# Altium PCB switch_mode.PcbDoc
Units mil, origin at the board's own origin, x right, y up, seen from the top; angles counter-clockwise.
Board outline 1830 x 1455 mil, 4 copper layers (Top Layer, Plane (GND), Plane (PWR), Bottom Layer), stack 23.756 mil thick; 16 components, 11 nets, 41 pads, 10 vias.
Unrouted connection lines stored in the file: 13.
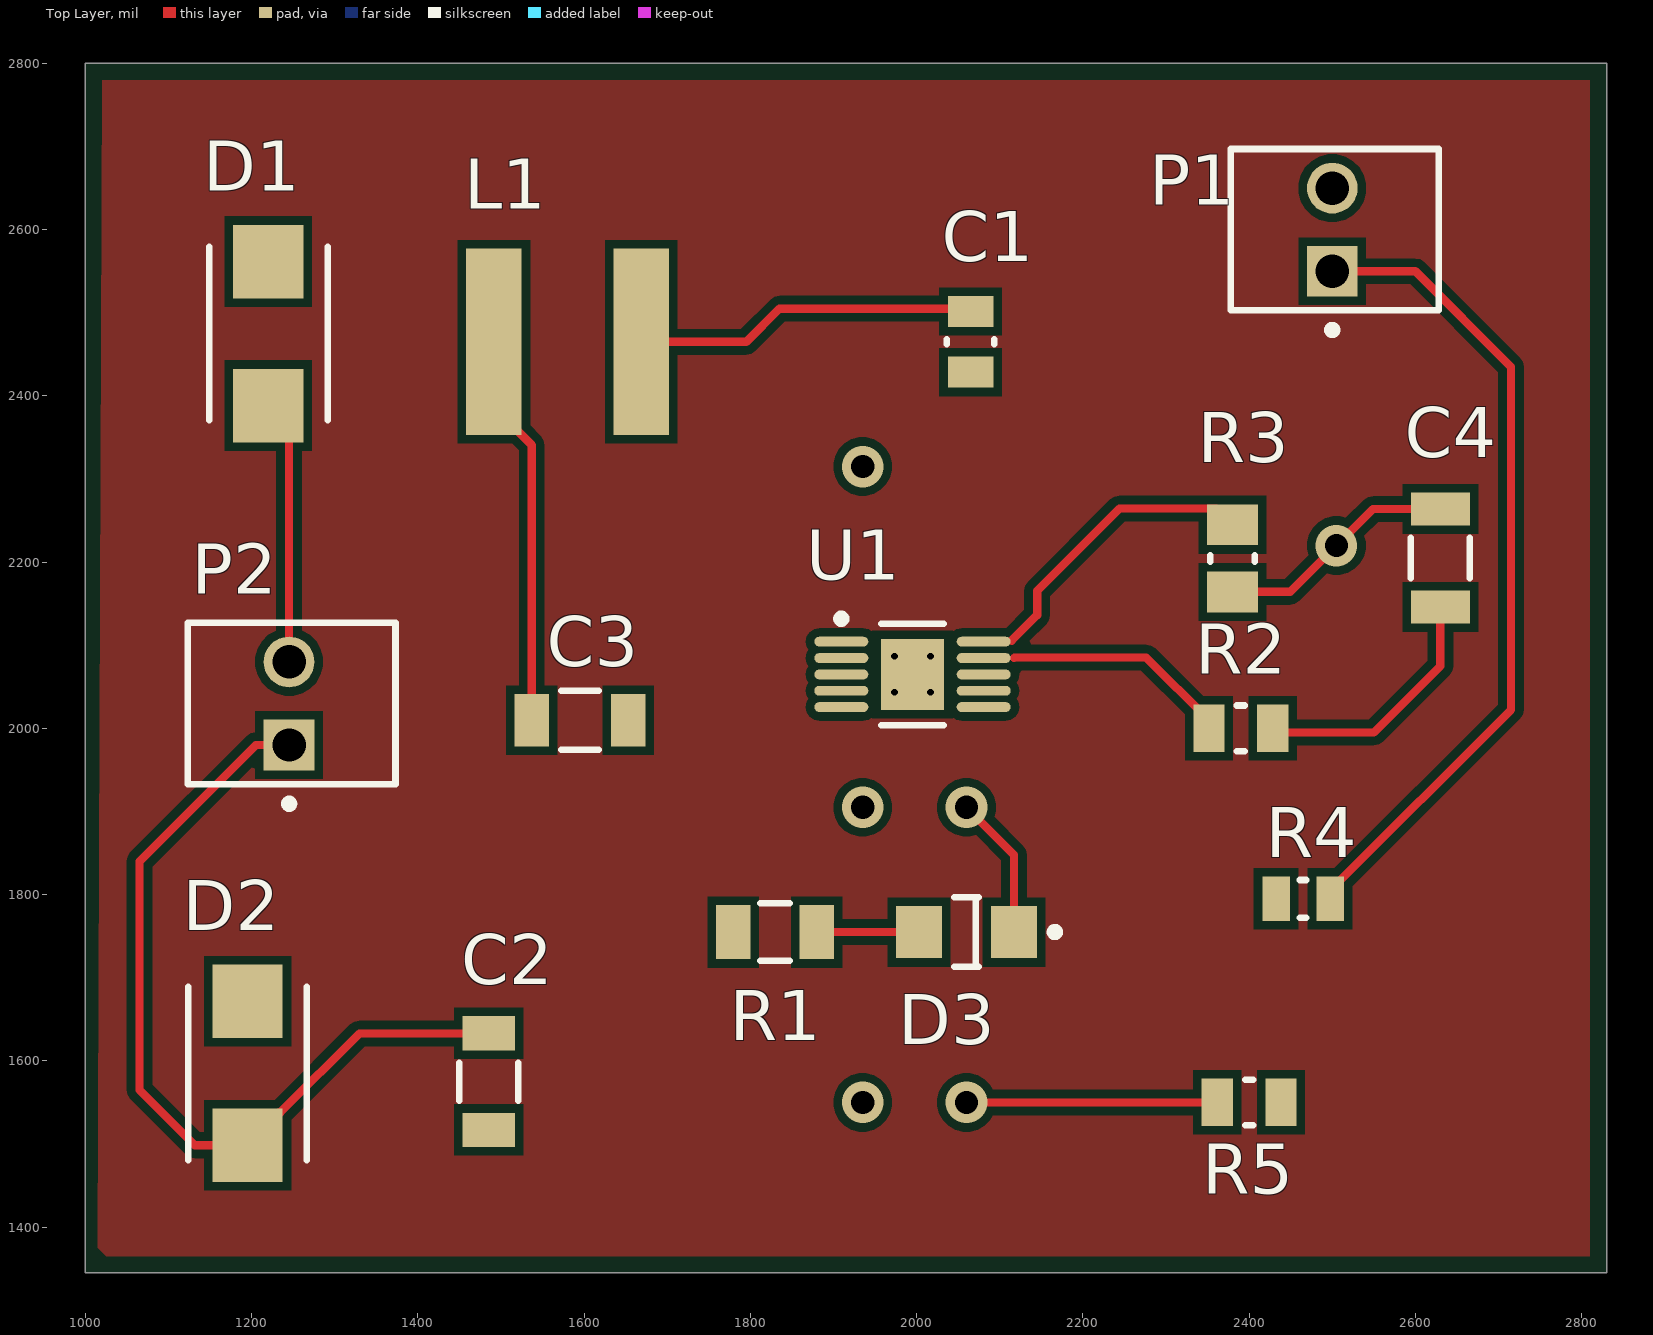
[diagram p0: Top Layer view]
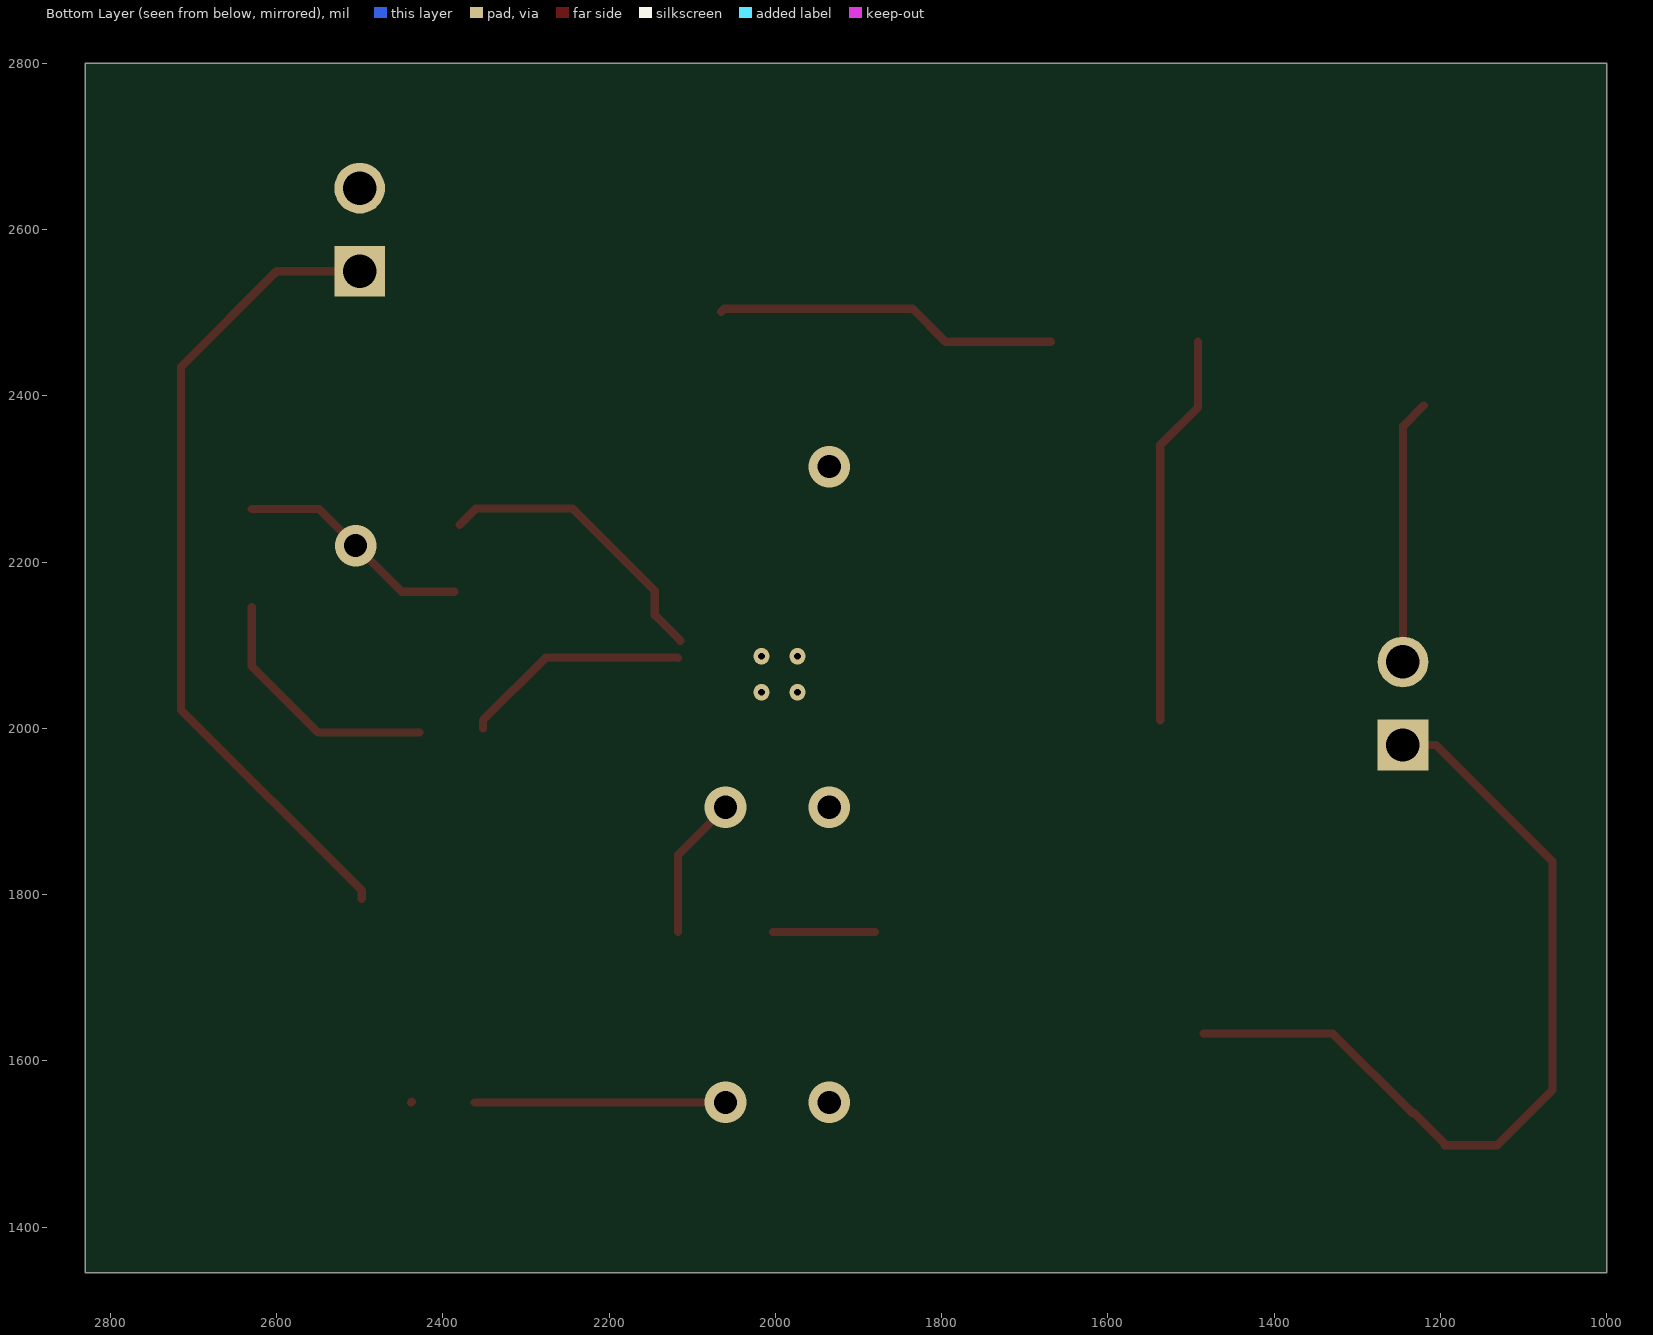
[diagram p1: Bottom Layer view, seen from below]
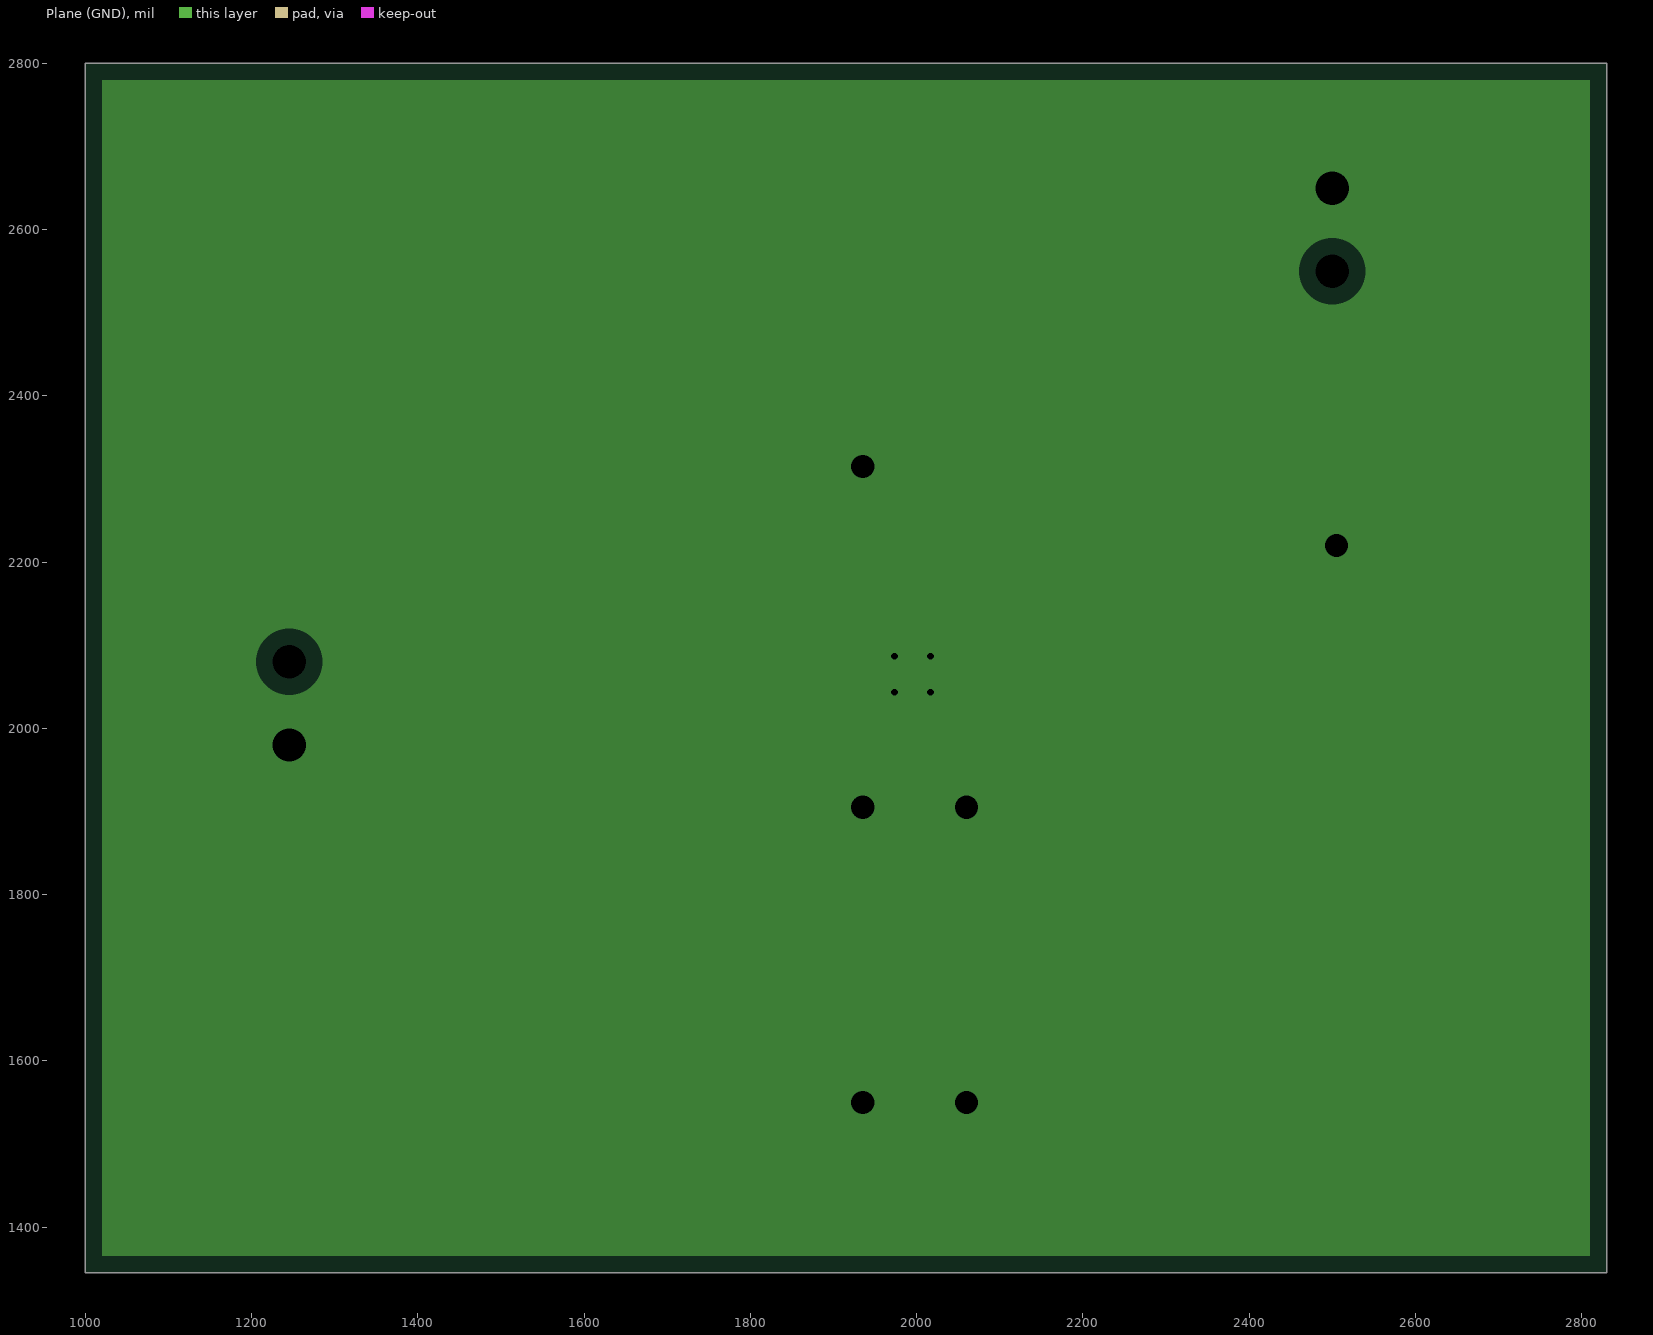
[diagram p2: Plane (GND), clearances drawn from the general rule]
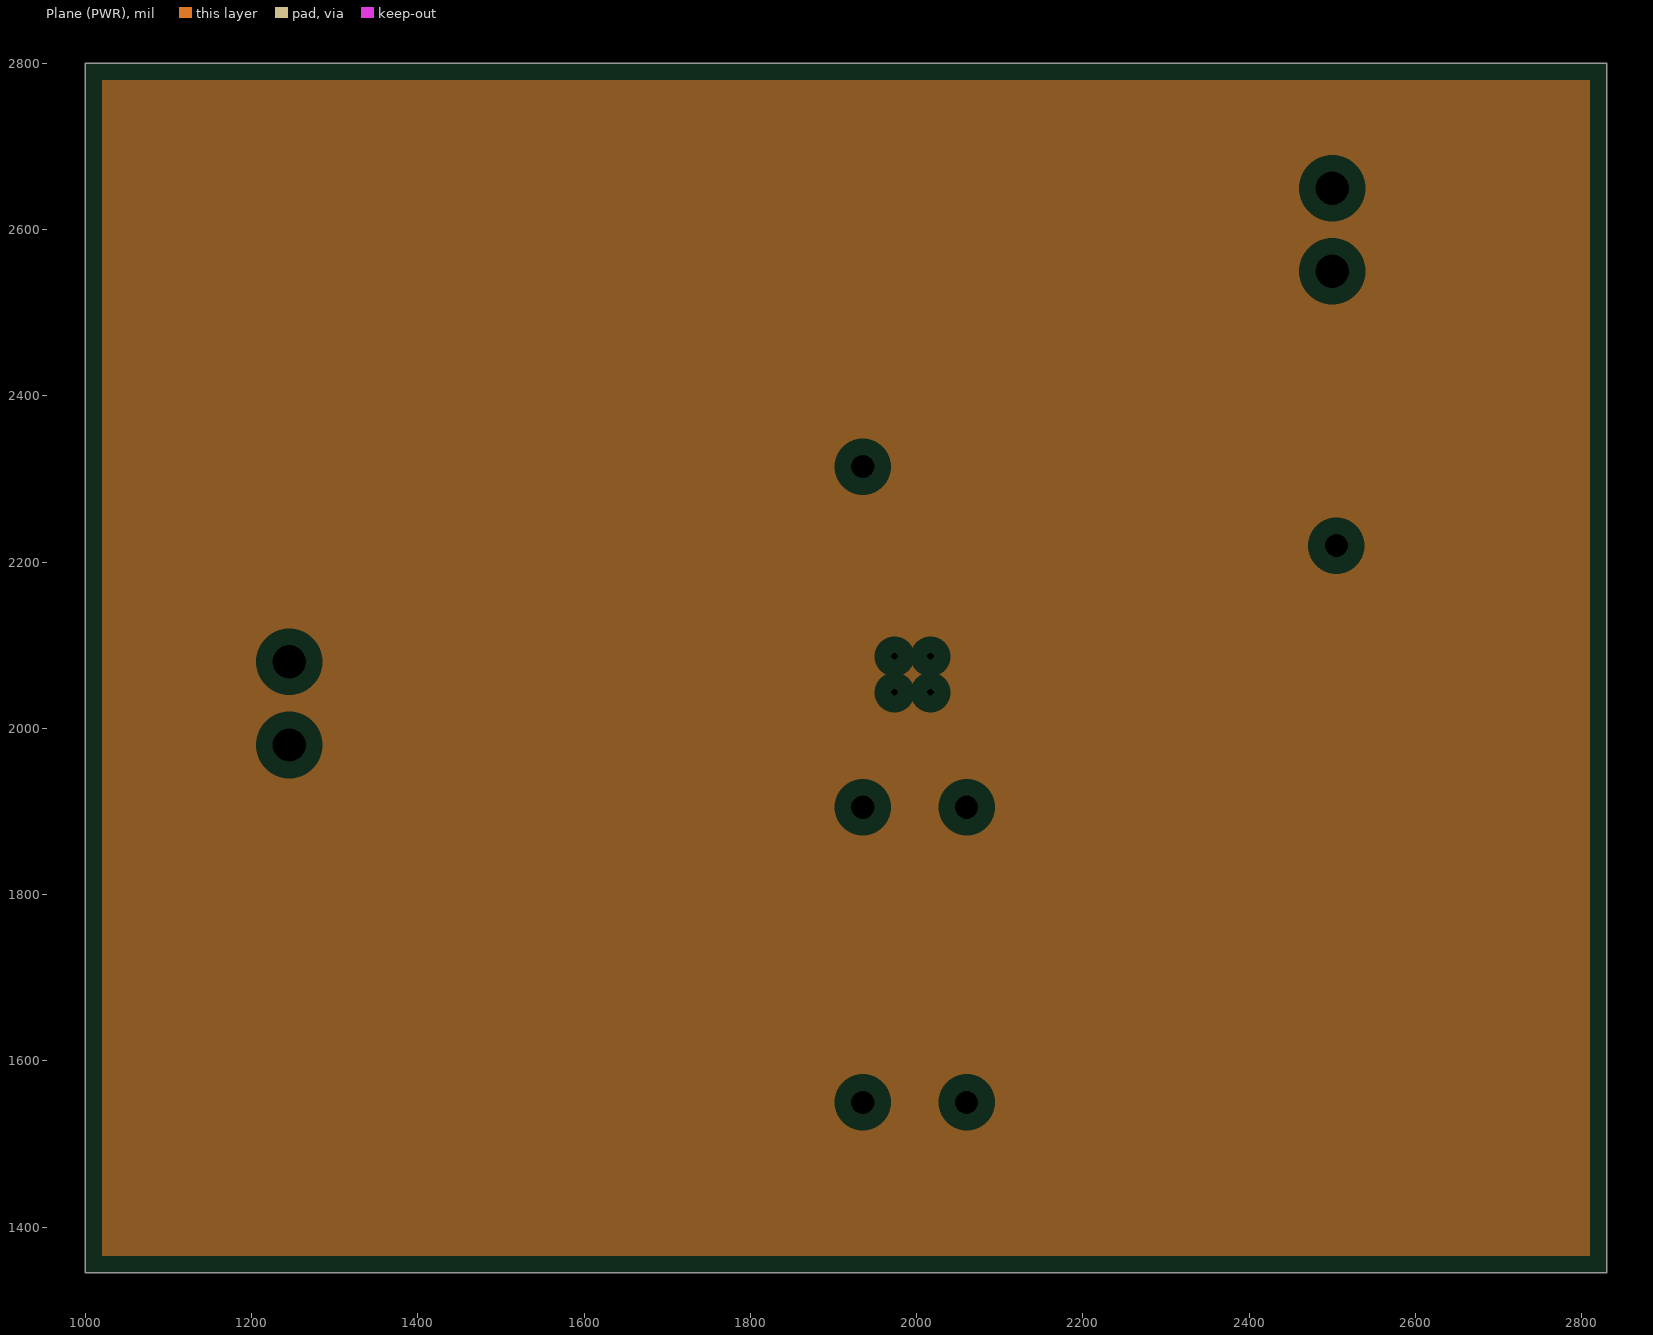
[diagram p3: Plane (PWR), clearances drawn from the general rule]
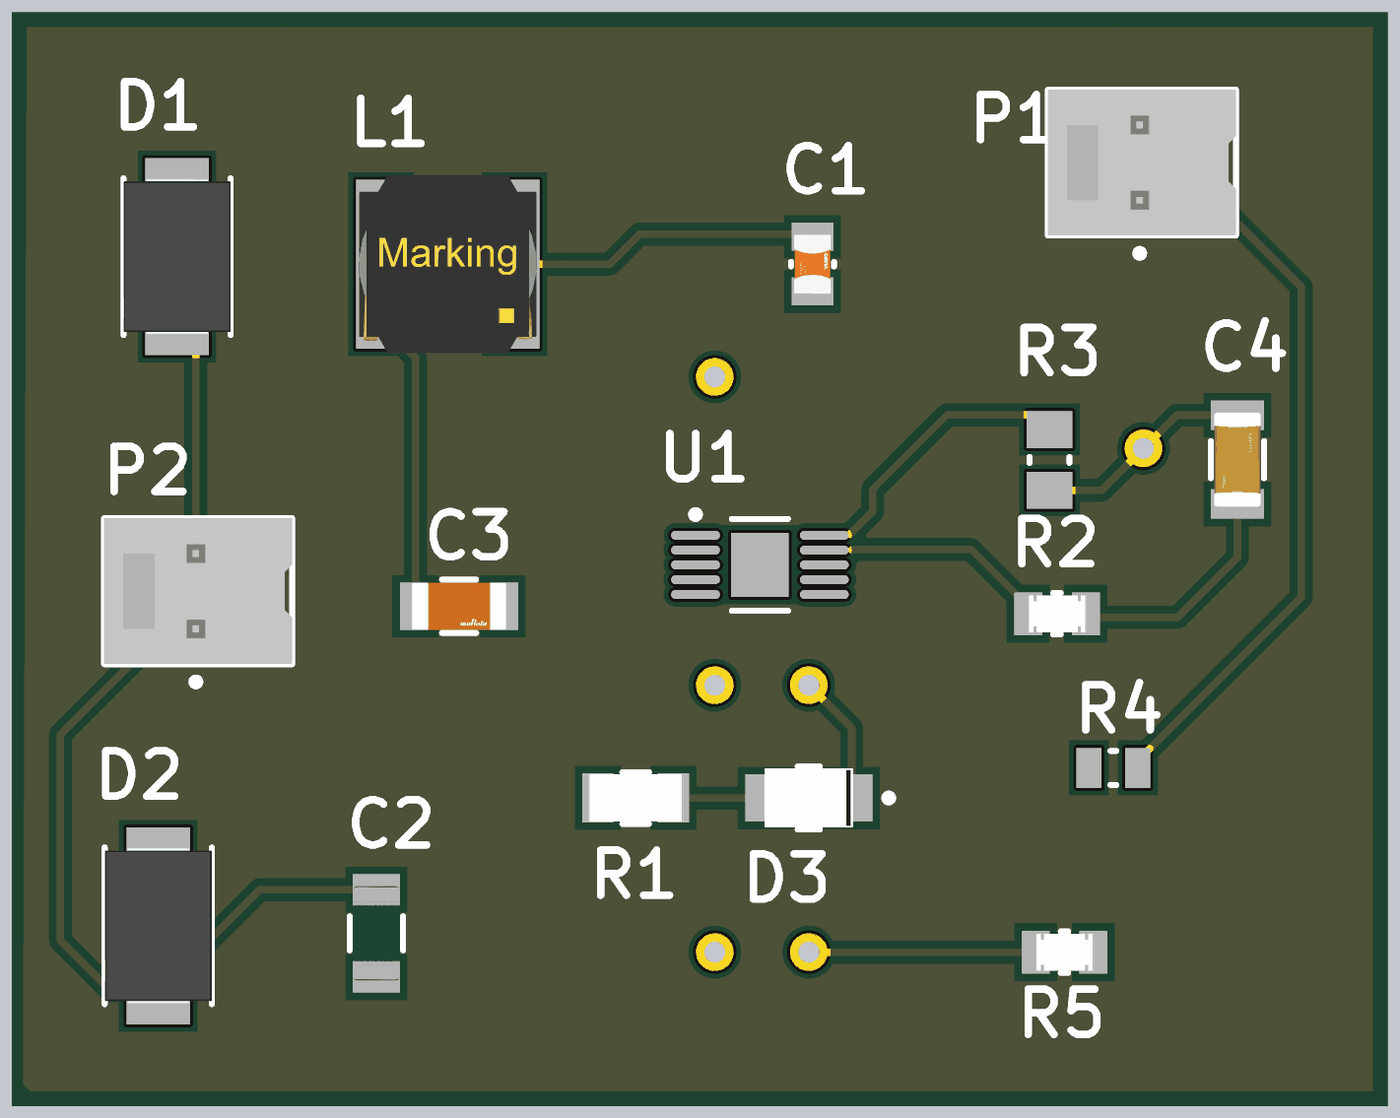
[diagram p4: 3D render of the assembled board from above, using the file's embedded part models]

## Layer stack, top to bottom
Top Solder: solder mask 0.4, Solder Resist, Dk 3.5
Top Layer: signal copper 1.4
Dielectric 2: prepreg 2.8, PP-006, Dk 4.1
Plane (GND): plane copper 1.378, net GND
Dielectric 1: dielectric 12.6, FR-4, Dk 4.8
Plane (PWR): plane copper 1.378
Dielectric 3: prepreg 2.8, PP-006, Dk 4.1
Bottom Layer: signal copper 1.4
Bottom Solder: solder mask 0.4, Solder Resist, Dk 3.5

## Board outline
1000,1345 2830,1345 2830,2800 1000,2800

## Design rules (kind name [scope] priority, off if disabled: settings)
Clearance [All] p1: gap=10 ignorepadtopadclearanceinfootprint=TRUE except(0: Arc-Hole Track-Hole SMDPad-Hole THPad-Hole Via-Hole Fill-Hole Poly-Hole Region-Hole Text-Hole)
PlaneClearance [All] p1: clearance=20
PlaneConnect [All] p1: planeconnectstyle=Relief reliefexpansion=20 reliefentries=4 reliefconductorwidth=10 reliefairgap=10
PolygonConnect [All] p1: thpad.connectstyle=Relief thpad.reliefconductorwidth=10 thpad.reliefentries=4 thpad.polygonreliefangle="90 Angle" thpad.airgapwidth=10 smdpad.connectstyle=Relief smdpad.reliefconductorwidth=10 smdpad.reliefentries=4 smdpad.polygonreliefangle="90 Angle" smdpad.airgapwidth=10 via.connectstyle=Direct via.reliefconductorwidth=10 via.reliefentries=4 via.polygonreliefangle="90 Angle" via.airgapwidth=10
RoutingVias [InNet('GND')] p1: holewidth=28 width=50 viastyle="Through Hole" minholewidth=28 minwidth=50 maxholewidth=28 maxwidth=50
SolderMaskExpansion [All] p1: expansion=4 istentingtop=FALSE
Width [All] p1: maxlimit=10 minlimit=10 preferedwidth=10
28 further rules are at their usual default settings.

## Components (designator, comment, footprint, x,y, rotation, side; value= is the part's Value field where it differs from the comment)
C1 "CC0805KKX7R7BB474" FP-CC0805-0_85-MFG 2065,2465 r90 top value="470 nF"
C2 "GRM31CR61H106KA12L" FP-GRM31-0_2-MFG 1485,1575 r90 top value=10uF
C3 "GRM31CR71A226KE15L" FP-GRM31C-0_2-e0_3_0_8-MFG 1595,2010 r0 top
C4 "CC1206KRX7R9BB331" FP-CC1206-1_25-MFG 2630,2205 r90 top value="330 pF"
D1 "B230-13-F" DIONM5336X250N 1220,2475 r90 top
D2 "B230-13-F" DIONM5336X250N 1195,1585 r90 top
D3 "597-3301-507F" FP-597-3301-507F-MFG 2060,1755 r180 top
L1 "74404064100" "WE-LQS 6045" 1580,2465 r180 top
P1 "22-23-2021" MOLX-22-23-2021_V 2500,2600 r90 top
P2 "22-23-2021" MOLX-22-23-2021_V 1245,2030 r90 top
R1 "MCA12060D5000BP500" FP-MCA1206-IPC_C 1829.75,1755 r180 top
R2 "CRCW080530K0FKEA" FP-CRCW0805-e3-MFG 2390,2000 r180 top
R3 "CRCW080560K4FKEA" RESC2013X50X30ML20T20 2380,2204.65 r90 top
R4 "CRCW0805845KFKEA" RESC2013X50X30LL20T20 2465,1795 r180 top
R5 "CRCW0805100KFKEA" FP-CRCW0805-e3-MFG 2400,1550 r180 top
U1 "LT3481EMSE#TRPBF" LT-MSE-10-EDP-2060x1830TP_M 1995,2065 r0 top

## Footprints (in the part's own frame and the unit in brackets; to place one, negate y for a bottom-side part, rotate by r counter-clockwise, add the part's x,y. Pads: shape width x height; smd on the part's side, far side on the other; paste and mask are expansions set on the pad)
DIONM5336X250N [mm]
  rect 2.25x2.15 smd: 1(-2.2,0) 2(2.2,0)
  silkscreen extent -2.65,-1.81 2.65,1.81, body extent -2.65,-1.81 2.65,1.81, height 2.5
FP-597-3301-507F-MFG [mm]
  rect 1.4x1.6 smd paste+0 mask+0: 1(-1.45,0) 2(1.45,0)
  silkscreen extent -2.83,-1.06 0.38,1.06, body extent -2.25,-1.16 2.25,1.16, height 0.25
FP-CC0805-0_85-MFG [mm]
  rect 0.95x1.4 smd paste+0 mask+0: 1(-0.925,0) 2(0.925,0)
  silkscreen extent -0.08,-0.72 0.08,0.72, body extent -1.6,-1.05 1.6,1.05, height 0.25
FP-CC1206-1_25-MFG [mm]
  rect 1x1.8 smd paste+0 mask+0: 1(-1.5,0) 2(1.5,0)
  silkscreen extent -0.63,-0.9 0.63,0.9, body extent -2.2,-1.25 2.2,1.25, height 0.25
FP-CRCW0805-e3-MFG [mm]
  rect 0.95x1.45 smd paste+0 mask+0: 1(-0.975,0) 2(0.975,0)
  silkscreen extent -0.13,-0.7 0.13,0.7, body extent -1.55,-0.82 1.55,0.82, height 0.25
FP-GRM31-0_2-MFG [mm]
  rect 1.05x1.6 smd paste+0 mask+0: 1(-1.475,0) 2(1.475,0)
  silkscreen extent -0.58,-0.9 0.58,0.9, body extent -2.1,-1 2.1,1, height 0.25
FP-GRM31C-0_2-e0_3_0_8-MFG [mm]
  rect 1.05x1.6 smd paste+0 mask+0: 1(-1.475,0) 2(1.475,0)
  silkscreen extent -0.58,-0.9 0.58,0.9, body extent -2.1,-1 2.1,1, height 0.25
FP-MCA1206-IPC_C [mil]
  rect 41.56x65.28 smd paste+0 mask+0: 1(-50.25,0) 2(50.25,0)
  silkscreen extent -18,-34 18,34, body extent -75,-38 75,38, height 10
LT-MSE-10-EDP-2060x1830TP_M [mm] "SOP, 10-Leads, Body 3.1x3.1mm, Pitch 0.5mm, Thermal Pad 2.17x1.94mm, IPC Low Density"
  oval 1.65x0.3 smd: 1(-2.175,1) 2(-2.175,0.5) 3(-2.175,0) 4(-2.175,-0.5) 5(-2.175,-1) 6(2.175,-1) 7(2.175,-0.5) 8(2.175,0) 9(2.175,0.5) 10(2.175,1)
  rect 1.94x2.17 smd: 223(0,0)
  silkscreen extent -2.3,-1.55 0.95,1.82, body extent -1.55,-1.55 1.55,1.55, height 1.1
MOLX-22-23-2021_V [mm] "THD, 2-Leads, Body 6.35x4.93mm, Pitch 2.54mm"
  rect 1.55x1.55 hole 1.02: 1(-1.27,0)
  round 1.55 hole 1.02: 2(1.27,0)
  silkscreen extent -3.19,-3.25 2.46,3.1, body extent -2.46,-3.25 2.46,3.1, height 10.66
RESC2013X50X30LL20T20 [mm] "Chip Resistor, 2-Leads, Body 2.00x1.25mm, IPC High Density"
  rect 0.85x1.35 smd: 1(-0.825,0) 2(0.825,0)
  silkscreen extent -0.1,-0.58 0.1,0.58, body extent -1.1,-0.72 1.1,0.72, height 0.5
RESC2013X50X30ML20T20 [mm] "Chip Resistor, 2-Leads, Body 2.00x1.25mm, IPC Low Density"
  rect 1.25x1.55 smd: 1(-1.025,0) 2(1.025,0)
  silkscreen extent -0.1,-0.67 0.1,0.67, body extent -1.1,-0.72 1.1,0.72, height 0.5
"WE-LQS 6045" [mm] "SMD Power Inductor, 2-Leads, Body 6.0x6.0mm"
  rect 1.7x5.7 smd: 1(-2.25,0) 2(2.25,0)
  body extent -3,-3 3,3, height 4.47

## Part data
C1: library part CMP-03422-000080-1, "CAP CER 0.47UF 16V X7R 0805", Capacitance="470 nF", Manufacturer=Yageo, Package=CC0805-0.85, Temperature="-30°C to +85°C", Temperature Characteristic=X7R, Temperature Range High=+85°C, Temperature Range Low=-30°C, Tolerance=0.1, Voltage Rating="16 V", Automotive=No, Category=Cap, ComponentLink2Description=Datasheet, ComponentLink2URL=http://www.yageo.com/documents/recent/UPY-GPHC_Y5V_6.3V-to-50V_8.pdf, Device Class L1="Passive Components", Device Class L2=Capacitors, Device Class L3="Ceramic Capacitors", Digikey Description="CAP CER 0.47UF 16V X7R 0805", Footprint Url=http://www.yageo.com/exep/pages/download/literatures/UPY-C_GEN_24.pdf, Height=0.95mm, Ipc Land Pattern Name=CAPC200125X85, Lead Free=Yes, Manufacturer Part Number=CC0805KKX7R7BB474, Material=Ceramic, Mouser Description="0805 0.47 uF 16 V ±10% Tolerance X7R SMT Multilayer Ceramic Capacitor", Octopart=https://octopart.com/cc0805kkx7r7bb474-yageo-42522863, RoHS=TRUE
C2: library part CMP-2000-05256-2, "CAP CER 10UF 50V X5R 1206", Capacitance=10uF, Manufacturer="Murata Electronics North America", Package=GRM31-0.2, Temperature="-55°C to +85°C", Temperature Characteristic=X5R, Temperature Coefficient=15%, Temperature Range High=+85°C, Temperature Range Low=-55°C, Tolerance=10%, Voltage Rating=50V, Automotive=No, Category=Cap, ComponentLink2Description=Datasheet, ComponentLink2URL=https://search.murata.co.jp/Ceramy/image/img/A01X/G101/ENG/GRM31CR61H106KA12-01A.pdf, Device Class L1="Passive Components", Device Class L2=Capacitors, Device Class L3="Ceramic Capacitors", Digikey Description="CAP CER 10UF 50V X5R 1206", Height=1.8mm, Lead Free=Yes, Manufacturer Part Number=GRM31CR61H106KA12L, Material=Ceramic, Mouser Description="Multilayer Ceramic Capacitors MLCC - SMD/SMT 1206 10uF 50volt X5R +/-10%", Octopart=https://octopart.com/grm31cr61h106ka12l-murata-18903335, RoHS=TRUE
C3: library part CMP-06035-003841-1, "Chip Multilayer Ceramic Capacitors for General Purpose, 1206, 22uF, X7R, 15%, 10%, 10V", Capacitance=22uF, Case Code (Imperial)=1206, Case Code (Metric)=3216, Dielectric=X7R, Max Operating Temperature=125°C, Min Operating Temperature=-55°C, Package Quantity=1, Tolerance=10%, Voltage=10V, Case/Package=1206, Depth=1.6mm, Height=1.6mm, Lead Free="Lead Free", Length=3.2mm, Material=Ceramic, Mount="Surface Mount", Packaging="Tape and Reel", Radiation Hardening=No, REACH SVHC="No SVHC", Termination=SMD/SMT, Thickness=0.071inch, Voltage Rating=10V, Voltage Rating (DC)=10V, Width=0.063inch
C4: library part CMP-03422-000307-1, "CAP CER 330PF 50V X7R 1206", Capacitance="330 pF", Manufacturer=Yageo, Package=CC1206-1.25, Temperature="-55°C to +125°C", Temperature Characteristic=X7R, Temperature Coefficient=15%, Temperature Range High=+125°C, Temperature Range Low=-55°C, Tolerance=0.1, Voltage Rating="50 V", Automotive=No, Automotive Grade=NA, Category=Cap, ComponentLink2Description=Datasheet, ComponentLink2URL=http://www.yageo.com/documents/recent/UPY-NP0X7R_HV_1KV-to-3KV_11.pdf, Device Class L1="Passive Components", Device Class L2=Capacitors, Device Class L3="Ceramic Capacitors", Digikey Description="CAP CER 330PF 50V X7R 1206", Footprint Url=http://www.yageo.com/exep/pages/download/literatures/UPY-C_GEN_24.pdf, Height=1.45mm, Lead Free=Yes, Manufacturer Part Number=CC1206KRX7R9BB331, Material=Ceramic, Mouser Description="1206 330 pF 50 V ±10 % Tolerance X7R SMT Multilayer Ceramic Capacitor", Octopart=https://octopart.com/cc1206krx7r9bb331-yageo-193019, RoHS=TRUE
D1 D2: "Diode", Manufacturer_Name="Diodes Inc.", Mouser Part Number=621-B230-F, Arrow Part Number=B230-13-F, Arrow Price/Stock=https://www.arrow.com/en/products/b230-13-f/diodes-incorporated, Datasheet Link=https://componentsearchengine.com/Datasheets/2/B230-13-F.pdf, Height=2.5mm, Manufacturer_Part_Number=B230-13-F, Mouser Price/Stock=https://www.mouser.co.uk/ProductDetail/Diodes-Incorporated/B230-13-F?qs=vC9GXGO01wXQLD6VVDHa%2Fw%3D%3D
D3: library part CMP-15384-000001-1, "LED GREEN CLEAR 1208 SMD", Colour=Green, Forward Current=20mA, Forward Voltage=2.2V, Manufacturer=Dialight, Power Dissipation=70mW, Temperature="-30°C to +85°C", Temperature Range High=+85°C, Temperature Range Low=-30°C, Automotive=No, Category=Diode, ComponentLink2Description=Datasheet, ComponentLink2URL=http://www.dialightsignalsandcomponents.com/Assets/Drawings/2D_Drawings_DrawingDetailedSpec/C17290.pdf, Device Class L1=Optoelectronics, Device Class L2=LEDs, Device Class L3=unset, Digikey Description="LED GREEN CLEAR 1208 SMD", Height=1.5mm, Lead Free=Yes, Led Orientation="Top View", Luminous Intensity=25mcd, Manufacturer Part Number=597-3301-507F, Mouser Description="Standard LEDs - SMD Green 563nm 16mcd 2.2V 104 deg", Octopart=https://octopart.com/597-3301-507f-dialight-117926, Package=597-3301-507F, Peak Emmision Wavelength=570nm, RoHS=TRUE, Viewing Angle=110°, Wavelength=573nm
L1: library part CMP-1354-00072-1, "WE-LQS SMD Power Inductor, L=10.0 µH", Inductance="10.0 ÂµH", Manufacturer="Wuerth Elektronik", ComponentLink1Description="Manufacturer URL", ComponentLink1URL=http://www.we-online.com, ComponentLink2Description=Datasheet, ComponentLink2URL=http://katalog.we-online.de/pbs/datasheet/74404064100.pdf, PackageReference="WE-LQS 6045", PartNumber=74404064100
P1 P2: library part CMP-1704-00001-3, "Male Header, Pitch 2.54 mm, 1 x 2 Position, Height 10.67 mm, Tail Length 3.56 mm, 0 to 75 degC, RoHS, Bulk", Max Operating Temperature="75 degC", Min Operating Temperature="0 degC", Package Quantity=3000, ComponentLink1Description="Manufacturer URL", ComponentLink1URL=http://www.molex.com/, ComponentLink2Description=Datasheet, ComponentLink2URL=https://datasheet.ciiva.com/19454/232266-19454304.pdf, Height="10.67 mm", Length="5.08 mm", Mount="Through Hole", Mounting Technology="Through Hole", PackageDescription="Male Header, Pitch 2.54 mm, 1 x 2 Position, Height 10.67 mm, Tail Length 3.56 mm", Packaging=Bulk, PartNumber=22-23-2021, Pins=2, Radiation Hardening=No, REACH SVHC=Unknown, RoHSCompliant=True, Width="6.35 mm"
R1: library part CMP-02407-005036-1, "Res MC Precision Thin Film 1206 500Ω 0.1% 0.25W ±25ppm/°C Molded Paper T/R", Case/Package=1206, Max Operating Temperature=125°C, Max Power Dissipation=250mW, Min Operating Temperature=-55°C, Package Quantity=5000, Resistance=500R, Temperature Coefficient=25ppm/°C, Tolerance=0.1%, Composition="Thin Film", Depth=1.6mm, Height=0.026inch, Lead Free="Lead Free", Length=0.126inch, Military Standard=Not, Number of Terminations=2, Packaging="Tape and Reel", Width=0.063inch
R2: library part CMP-2001-03804-2, "RES Thick Film, 30kΩ, 1%, 0.125W, 100ppm/°C, 0805", Case Code (Imperial)=0805, Case Code (Metric)=2012, Max Operating Temperature=155°C, Max Power Dissipation=125mW, Min Operating Temperature=-55°C, Package Quantity=10, Resistance=30kR, Temperature Coefficient=100ppm/°C, Tolerance=1%, Voltage Rating=150V, Case/Package=0805, Composition="Thick Film", Contact Plating=Tin, Depth=1.25mm, Features="Automotive AEC-Q200", Height=0.45mm, Lead Free="Lead Free", Length=2mm, Military Standard=Not, Mount="Surface Mount", Number of Pins=2, Number of Terminations=2, Packaging="Tape and Reel", Power Rating=125mW, Radiation Hardening=No, Termination=SMD/SMT, Voltage Rating (DC)=150V, Weight=0.000194oz, Width=0.049inch
R3: library part CMP-2001-04043-1, Manufacturer="Vishay Dale", Resistance=60.4kR, Part Number=CRCW080560K4FKEA
R4: library part CMP-2001-04139-1, Manufacturer="Vishay Dale", Resistance=845kR, Part Number=CRCW0805845KFKEA
R5: library part CMP-2001-04899-2, "RES Thick Film, 100kΩ, 1%, 0.125W, 100ppm/°C, 0805", Case Code (Imperial)=0805, Case Code (Metric)=2012, Max Operating Temperature=155°C, Min Operating Temperature=-55°C, Package Quantity=5000, Power Rating=125mW, Resistance=100kR, Temperature Coefficient=100ppm/°C, Tolerance=1%, Voltage Rating=150V, Case/Package=0805, Composition="Thick Film", Contact Plating=Tin, Depth=1.25mm, Height=0.45mm, Lead Free="Lead Free", Length=2mm, Military Standard=Not, Mount="Surface Mount", Number of Pins=2, Packaging="Tape and Reel", Radiation Hardening=No, Termination=SMD/SMT, Voltage Rating (DC)=150V, Weight=0.000194oz, Width=1.25mm
U1: library part CMP-0491-01083-1, "2 A, 2.8 MHz Step-Down Switching Regulator with 50 uA Quiescent Current, 10-pin SOP (MSE-10-EDP), -40 to 85 degC, Pb-Free, Tape and Reel", Frequency Sync Range="275kHz - 475kHz", Manufacturer="Linear Technology", ComponentLink1Description="Manufacturer URL", ComponentLink1URL=http://www.linear.com/, ComponentLink2Description=Datasheet, ComponentLink2URL=http://cds.linear.com/docs/en/datasheet/3481fc.pdf, ComponentLink3Description="Package Specification", ComponentLink3URL=http://cds.linear.com/docs/en/datasheet/3481fc.pdf, DatasheetVersion="Rev. C", Mounting Technology="Surface Mount", Number of Outputs=1, PackageDescription="10-Pin Plastic MSOP, Exposed Die Pad, Body 3 x 3 mm, Pitch 0.5 mm", PackageReference=MSE-10, PackageVersion="Rev. C, 08/2009", Packing="Tape and Reel", PartNumber=LT3481EMSE#TRPBF, RoHS=TRUE

## Via types
v1: diameter 50, hole 28, Top Layer to Bottom Layer, 6 vias
v2: diameter 19.68, hole 7.87, Top Layer to Bottom Layer, 4 vias

## Nets (pads, with @x,y where several pads share a name; then routed paths per layer and width w, separated by ;. In a path a pad name is that pad's centre, name@x,y a point inside that pad or via, vN(x,y) a via of type N, cw(c..) or ccw(c..) an arc to the next point about the centre after c; other vN are vias at no path point)
GND: C2.2 C3.2 C4.2 D2.1 D3.1 P1.2 P2.1 R3.1 R5.2 U1.223 | length 1778.2
  Top Layer w10: P2.1 1205,1980 1065,1840 1065,1565 1131.61,1498.39 D2.1 1195,1500.35 1232.32,1537.68 1234.29,1537.68 1329.69,1633.07 C2.2 ; v1(2060,1550) R5.2 ; v1(2060,1905) 2117.09,1847.91 D3.1 ; R3.1@2385.91,2164.29 2449.29,2164.29 2549.06,2264.06 C4.2
  other v1: 1935,1550 1935,1905 2505,2220 1935,2315
  other v2: 1973.35,2043.35 2016.65,2043.35 1973.35,2086.65 2016.65,2086.65
NetC1_1: C1.1 U1.2
NetC1_2: C1.2 D2.2 L1.1 U1.3 | length 414.5
  Top Layer w10: L1.1 1795,2465 1835,2505 2061.42,2505 C1.2
NetC2_1: C2.1 D1.2 U1.4 U1.5
NetC3_1: C3.1 L1.2 P1.1 R1.2 R4.1 U1.1 U1.7 | length 1466.6
  Top Layer w10: L1.2 1491.42,2386.26 1536.93,2340.75 C3.1 ; R4.1 2497.48,1804.84 2715,2022.36 2715,2435 2600,2550 P1.1
NetC4_1: C4.1 R2.1 | length 305.7
  Top Layer w10: R2.1@2428.39,1995 2550,1995 2630,2075 C4.1
NetD1_1: D1.1 P2.2 | length 318.7
  Top Layer w10: D1.1 1245,2363.39 P2.2
NetD3_2: D3.2 R1.1 | length 122.9
  Top Layer w10: R1.1 D3.2
NetR2_2: R2.2 U1.9 | length 276
  Top Layer w10: 2117.08,2084.68 2117.81,2085.41 2276.05,2085.41 2351.61,2009.84 R2.2
NetR3_2: R3.2 U1.10 | length 356.6
  Top Layer w10: 2114.38,2105.62 2145,2136.25 2145,2165.59 2244.02,2264.61 ; 2244.16,2264.61 2360.39,2264.61 R3.2
NetR4_2: R4.2 R5.1 U1.8 | length 1.3
  Top Layer w10: R5.1@2437.48,1550.91 R5.1
pads on no net: U1.6

## Polygon pours and split planes (outlines as drawn)
no net on Top Layer "NONET_L01_P000" (solid, pour order 0): 1020,2780 2810,2780 2810,1365 1025,1365 1015,1375
GND on Plane (GND) (split plane): 2809.9,1365.1 1020.1,1365.1 1020.1,2779.9 2809.9,2779.9
no net on Plane (PWR) (split plane): 2809.9,1365.1 1020.1,1365.1 1020.1,2779.9 2809.9,2779.9